# Altium PCB Final-Converter.PcbDoc
Units mil, origin at the board's own origin, x right, y up, seen from the top; angles counter-clockwise.
Board outline 5700 x 3075 mil, 2 copper layers (Top Layer, Bottom Layer); 12 components, 8 nets, 32 pads, 0 vias.
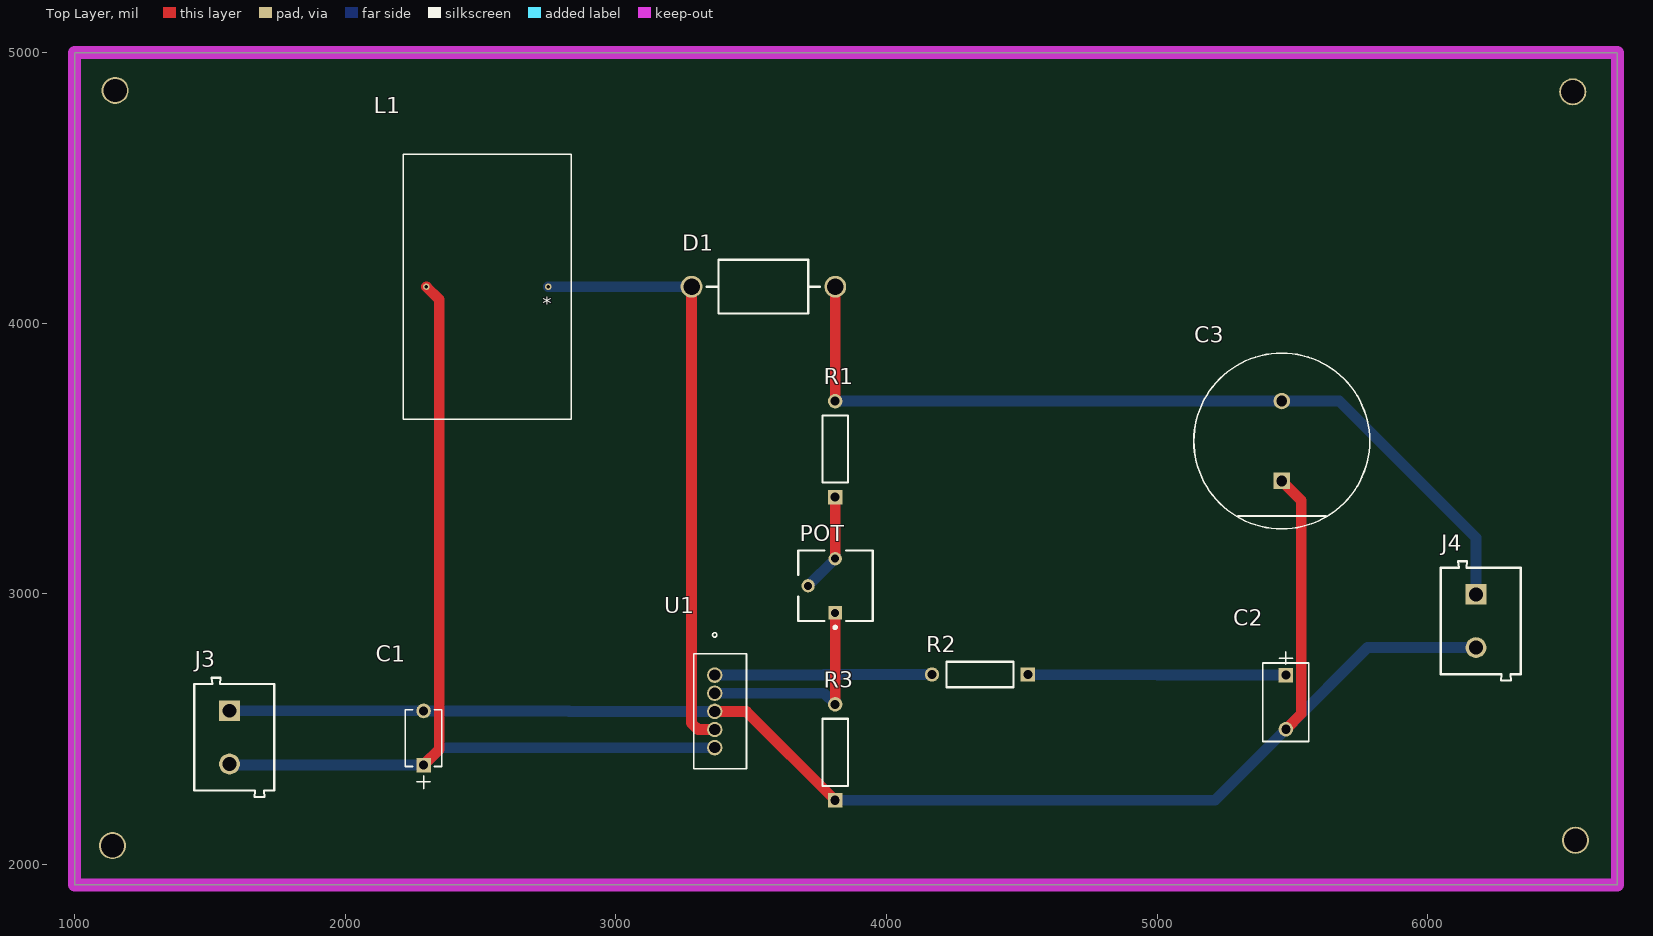
[diagram p0: Top Layer view]
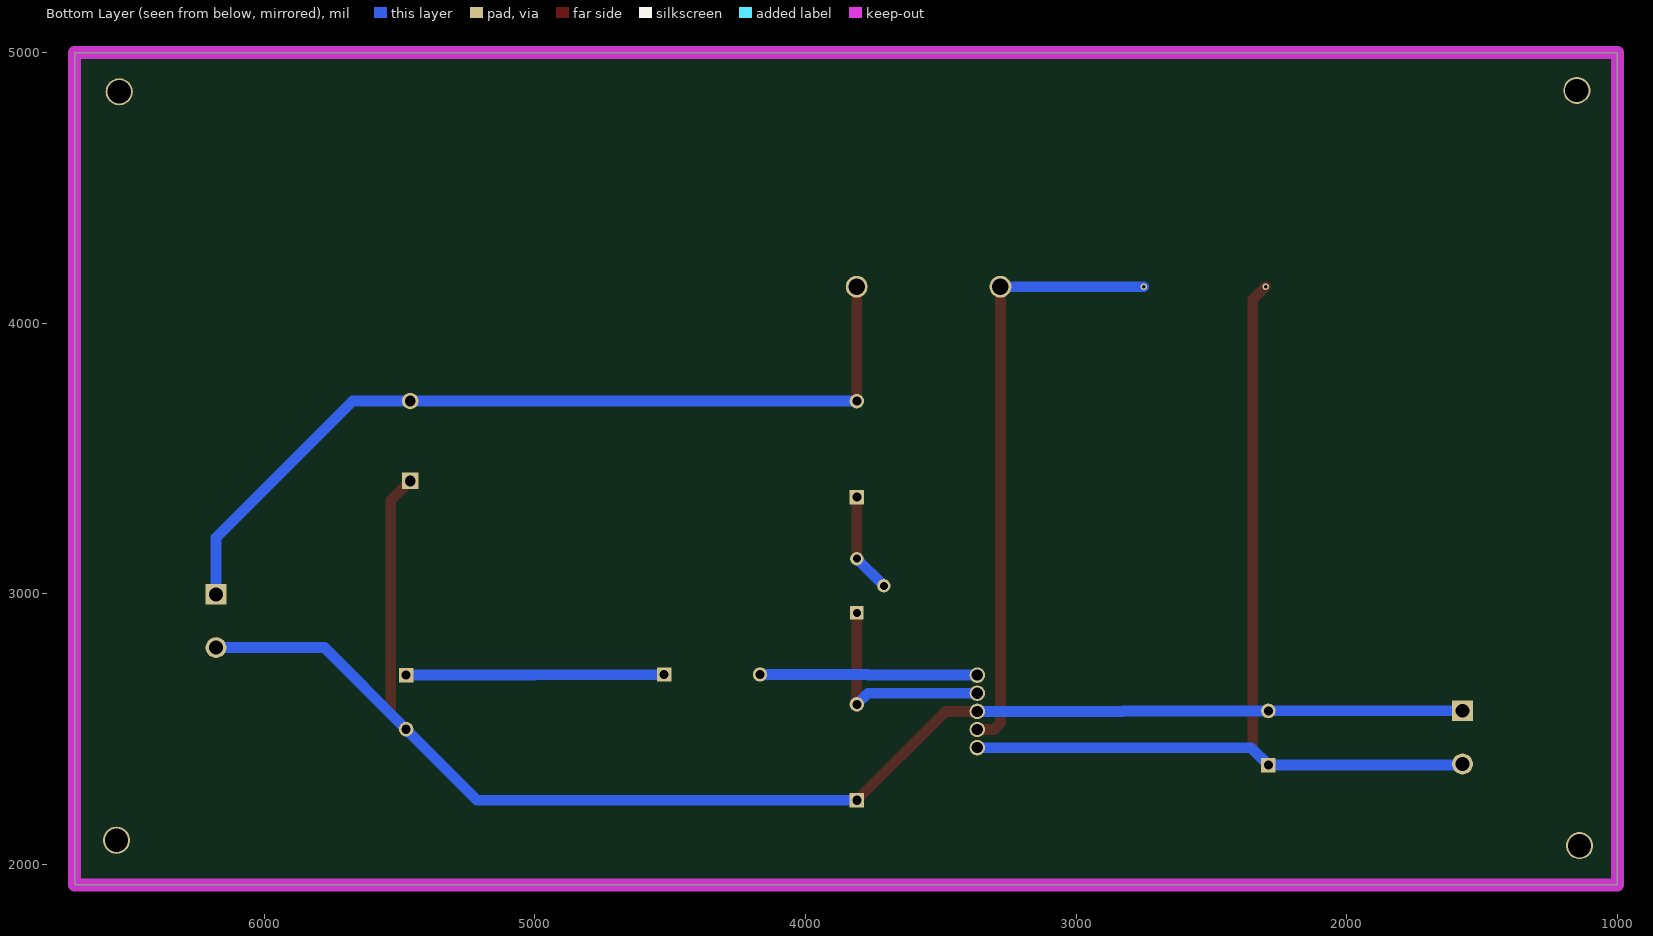
[diagram p1: Bottom Layer view, seen from below]

## Layer stack, top to bottom
Top Solder: solder mask 0.4, Solder Resist, Dk 3.5
Top Layer: signal copper 1.4
Dielectric 1: dielectric 12.6, FR-4, Dk 4.8
Bottom Layer: signal copper 1.4
Bottom Solder: solder mask 0.4, Solder Resist, Dk 3.5

## Board outline
1000,1925 6700,1925 6700,5000 1000,5000

## Design rules (kind name [scope] priority, off if disabled: settings)
Clearance [All] p1: gap=10 ignorepadtopadclearanceinfootprint=FALSE except(0: Arc-Hole Track-Hole SMDPad-Hole THPad-Hole Via-Hole Fill-Hole Poly-Hole Region-Hole Text-Hole)
Height [All] p1: minheight=0 maxheight=1500 prefheight=500
PolygonConnect [All] p1: connectstyle=Relief reliefconductorwidth=10 reliefentries=4 polygonreliefangle="90 Angle" airgapwidth=10
RoutingVias [All] p1: holewidth=28 width=50 viastyle="Through Hole" minholewidth=28 minwidth=50 maxholewidth=28 maxwidth=50
SolderMaskExpansion [All] p1: expansion=4 istentingtop=FALSE
Width [All] p1: maxlimit=40 minlimit=40 preferedwidth=40 minimp=50.000000 maximp=50.000000 favimp=50.000000
29 further rules are at their usual default settings.

## Components (designator, comment, footprint, x,y, rotation, side; value= is the part's Value field where it differs from the comment)
C1 "0.18uF" CAP_C322C_MR_X7R_KEM 2289.52,2367.62 r90 top
C2 "0.33uF" CAP_C330_MR_X7R_KEM 5475,2700 r270 top
C3 "1000uF / 100V" FP-RAD-TH-D_16_0_5-L_25_2-MFG 5460,3565 r90 top
D1 "1N5821" ONSC-AXIAL_LEAD-2-267-05_V 3545,4135 r180 top
J3 "Input Battery" 691102710002 1590,2470 r270 top
J4 "Output LED" 691102710002 6195,2900 r270 top
L1 "100uH" IND_PE-53115NL_PUL 2750,4135 r180 top
POT "100 kOhm" BOUR-3362P 3811.38,3030 r90 top
R1 "1 kOhm" RESA60-630X240 3810,3535 r90 top
R2 "2.2 kOhm" RESA60-630X240 4344.86,2702.31 r180 top
R3 "2.2 kOhm" RESA60-630X240 3810,2415 r90 top
U1 "LM2577T-ADJ/NOPB" T05A_TEX 3365,2700 r270 top

## Footprints (in the part's own frame and the unit in brackets; to place one, negate y for a bottom-side part, rotate by r counter-clockwise, add the part's x,y. Pads: shape width x height; smd on the part's side, far side on the other; paste and mask are expansions set on the pad)
691102710002 [mm] "5,00mm - modular - blue - Horizontal entry with pressure clamp - 9,9 mm height - 02p"
  rect 1.95x1.95 hole 1.3: 1(-2.5,-0.45)
  round 1.95 hole 1.3: 2(2.5,-0.45)
  silkscreen extent -5.6,-3.75 5.6,3.75, body extent -5.6,-3.75 5.6,3.75, height 9.96
BOUR-3362P [mm] "THD, 3-Leads, Body 6.6x6.99mm, Pitch 2.54mm"
  rect 1.25x1.25 hole 0.75: 1(-2.54,0.035)
  round 1.25 hole 0.75: 2(0,2.575) 3(2.54,0.035)
  silkscreen extent -4.02,-3.49 3.3,3.49, body extent -3.3,-3.49 3.3,3.49, height 4.95
CAP_C322C_MR_X7R_KEM [mil]
  rect 54x54 hole 34 mask+0: 1(0,0)
  round 54 hole 34 mask+0: 2(200,0)
  silkscreen extent -87,-68 205,67, body extent 0,0 10,10, height 10
CAP_C330_MR_X7R_KEM [mil]
  rect 54x54 hole 34 mask+0: 1(0,0)
  round 54 hole 34 mask+0: 2(200,0)
  silkscreen extent -87,-85 245,85, body extent 0,0 10,10, height 10
FP-RAD-TH-D_16_0_5-L_25_2-MFG [mm]
  rect 1.55x1.55 hole 1 paste-1000 mask+0: 1(-3.75,0)
  round 1.55 hole 1 paste-1000 mask+0: 2(3.75,0)
  silkscreen extent -8.25,-8.25 8.25,8.25, body extent -8.35,-8.35 8.35,8.35, height 0.25
IND_PE-53115NL_PUL [mil]
  round 24 hole 14 mask+0: 1(0,0) 2(450.39,0)
  silkscreen extent -85,-490 535,490, body extent -5,-485 460,485, height 1105
ONSC-AXIAL_LEAD-2-267-05_V [mm] "AXIAL, 2-Leads, Diameter 5.05mm"
  round 2.05 hole 1.55: 1(-6.745,0) 2(6.745,0)
  silkscreen extent -5.32,-2.53 5.32,2.53
RESA60-630X240 [mm] "Axial Resistor, 2-Leads, Dia 2.4mm, Body Length 6.3mm"
  rect 1.35x1.35 hole 0.85: 1(-4.5,0)
  round 1.35 hole 0.85: 2(4.5,0)
  silkscreen extent -3.15,-1.2 3.15,1.2, body extent -3.15,-1.2 3.15,1.2, height 2.4
T05A_TEX [mil]
  round 57 / inner round 57 / far side oval 57x57.5 hole 41 mask+7: 1(0,0) 2(67,0) 3(134,0) 4(201,0) 5(268,0)
  silkscreen extent -156,-78 346,118, body extent -74,-73 341,113, height 610

## Part data
C1: library part C322C184K5R5TA, "No Description Available", Mfr_Name=Kemet, Copyright="Copyright (C) 2022 Ultra Librarian. All rights reserved.", Digi-Key_Part_Number_1=399-C322C184K5R5TA-ND, Manufacturer_Part_Number=C322C184K5R5TA, RefDes=RefDes, Type=DEV
C2: library part "0.33uF Cap", "No Description Available", Manufacturer_Part_Number=C330C334K5R5TA, Mfr_Name=Kemet, Copyright="Copyright (C) 2022 Ultra Librarian. All rights reserved.", Digi-Key_Part_Number_1=399-4408-ND, RefDes=RefDes, Type=DEV
C3: library part CMP-05427-000487-1, "Aluminum Electrolytic Capacitors (Radial Lead Type) 1000uF ±20% 50V", Capacitance=1mF, Case/Package=Radial, ESR (Equivalent Series Resistance)=16mR, Max Operating Temperature=105°C, Min Operating Temperature=-40°C, Package Quantity=250, Ripple Current=3.32A, Tolerance=20%, Voltage Rating=50V, Contact Plating=Tin, Diameter=16mm, Features="General Purpose", Height=25mm, Height - Seated (Max)=0.984inch, Impedance=16mR, Lead Diameter=0.8mm, Lead Free="Lead Free", Lead Pitch=7.5mm, Length=25mm, Life (Hours)=10000Hour, Mount="Through Hole", Number of Pins=2, Packaging="Tape and Reel", Polarity=Polar, Radiation Hardening=No, REACH SVHC="No SVHC", RoHS Compliant=Yes, Series=FR, Termination="Through Hole", Voltage Rating (DC)=50V
D1: library part CMP-1055-00029-1, "Rectifier, 2-Pin Axial_Lead, Bulk Bag", Manufacturer="On Semiconductor", ComponentLink1Description="Manufacturer URL", ComponentLink1URL=http://www.onsemi.com/, ComponentLink2Description=Datasheet, ComponentLink2URL=http://www.onsemi.cn/pub_link/Collateral/1N5820-D.PDF, ComponentLink3Description="Package Specification", ComponentLink3URL=http://www.onsemi.com/pub_link/Collateral/267-05.PDF, Configuration=Single, DatasheetVersion="Rev. 10", IFSM Max (A)=80, Mounting Technology="Through Hole", Note1=0, PackageDescription="2-Pin, Axial Lead, Diameter 5.05 mm", PackageReference=AXIAL_LEAD-2-267-05, PackageVersion="Rev. G, 06/2000", Packing="Bulk Bag", PartNumber=1N5821, RoHS=FALSE
J3 J4: library part CMP-1502-03258-1, "Series 102 - 5.00 mm Horizontal Entry Modular with Pressure Clamp WR-TBL, 2 pin", Manufacturer="Wurth Elektronik", Operating Temperature=-40to105degC, Package Reference=691102710002, Datasheet URL=http://katalog.we-online.de/em/datasheet/6911027100xx.pdf, Manufacturer URL=http://www.we-online.de, Mounting Technology=THT, Packaging=Box, Part Number=691102710002, Pin Number=2, Pitch=5.00mm, Publisher=WurthElektronik
L1: library part PE-53115NL, "No Description Available", Mfr_Name="Pulse Electronics Corporation", Copyright="Copyright (C) 2022 Ultra Librarian. All rights reserved.", Digi-Key_Part_Number_1=553-1566-5-ND, Manufacturer_Part_Number=PE-53115NL, RefDes=RefDes, Type=DEV
POT: library part CMP-1747-00004-1, "Square Trimpot(R) Trimming Potentiometer, 10 KOhm, 300 V, -55 to 125 degC, 3-Pin THD, RoHS, Tube", Case Code (Imperial)=0612, Case Code (Metric)=1632, Case/Package=1206, Max Operating Temperature=125degC, Min Operating Temperature=-25degC, Package Quantity=5000, Power Rating="1 W", Resistance="50 mohm", Tolerance=1%, Voltage Rating="220 mV", ComponentLink1Description="Manufacturer URL", ComponentLink1URL=http://www.bourns.com/, ComponentLink2Description=Datasheet, ComponentLink2URL=http://www.bourns.com/docs/Product-Datasheets/3362.pdf, DatasheetVersion=May-16, Height="0.6 mm", Length="3.2 mm", Mount="Surface Mount", PackageDescription="3-Pin Through Hole Device, Body 6.6 x 6.99 mm, Pitch 2.54 mm", PackageReference=3326P, Packaging="Tape and Reel", Pins=2, REACH SVHC="No SVHC", RoHSCompliant=True, Width="1.6 mm"
R1 R2 R3: library part CMP-1659-00075-1, "Axial Resistor, 1 KOhm, +/- 1%, 250 mW, -55 to 155 degC, 2-Pin THD, RoHS, Bulk", Case\Package=Axial, Max Operating Temperature="155 degC", Min Operating Temperature="-55 degC", Package Quantity=200, Power Rating="250 mW", Resistance="10 kohm", Tolerance=1%, Voltage Rating="250 V", ComponentLink1Description="Manufacturer URL", ComponentLink1URL=http://www.yageo.com/, ComponentLink2Description=Datasheet, ComponentLink2URL=http://www.yageo.com/documents/recent/Yageo%20LR_MFR_2013.pdf, DatasheetVersion=Apr-13, Length="0.248 inch", PackageDescription="2-Pin Axial Lead, Dia 2.4 mm, Body Length 6.3 mm", PackageReference=MFR-25, Packaging=Bulk, RoHSCompliant=true
U1: "No Description Available", Mfr_Name="Texas Instruments", Copyright="Copyright (C) 2022 Ultra Librarian. All rights reserved.", Digi-Key_Part_Number_1=LM2577T-ADJ/NOPB-ND, Digi-Key_Part_Number_2=2156-LM2577T-ADJ/NOPB-ND, Digi-Key_Part_Number_3=2156-LM2577T-ADJ/NOPB-TI-ND, Manufacturer_Part_Number=LM2577T-ADJ/NOPB, RefDes=RefDes, Type=DEV

## Free pads (board coordinates)
  round 100 hole 86: 2(1140,2070) 2(1150,4860) 2(6535,4855) 2(6545,2090)

## Nets (pads, with @x,y where several pads share a name; then routed paths per layer and width w, separated by ;. In a path a pad name is that pad's centre, name@x,y a point inside that pad or via, vN(x,y) a via of type N, cw(c..) or ccw(c..) an arc to the next point about the centre after c; other vN are vias at no path point)
GND: C1.2 C2.2 C3.1 J3.1 J4.2 R3.1 U1.3 | length 5945.1
  Top Layer w40: U1.3 3481.83,2566 R3.1 ; C3.1 5532,3345.36 5532,2557 C2.2
  Bottom Layer w40: J3.1 C1.2@2288.71,2568.43 ; C1.2 2826,2567.62 2827.62,2566 U1.3 ; R3.1 5212.83,2237.83 C2.2 5776.58,2801.58 J4.2
NetC1_1: C1.1 J3.2 L1.2 U1.5 | length 3631.8
  Top Layer w40: C1.1 2347,2425.1 2347,4087.61 L1.2
  Bottom Layer w40: J3.2 1576.24,2367.62 C1.1 2353.9,2432 U1.5
NetC2_1: C2.1 R2.1 | length 953
  Bottom Layer w40: R2.1 5001.31,2700 C2.1
NetC3_2: C3.2 D1.1 J4.1 R1.2 | length 3209
  Top Layer w40: R1.2 3810,3923 3810.55,3923.55 D1.1
  Bottom Layer w40: R1.2 4634,3712.17 4634.47,3712.64 C3.2 5672.36,3712.64 6177.28,3207.72 J4.1
NetD1_2: D1.2 L1.1 U1.4 | length 2237.2
  Top Layer w40: D1.2 3279.45,2522.55 3303,2499 U1.4
  Bottom Layer w40: L1.1 D1.2
NetPOT_1: POT.1 R3.2 U1.2 | length 799.7
  Top Layer w40: R3.2 POT.1
  Bottom Layer w40: U1.2 3769.17,2633 R3.2
NetPOT_2: POT.2 POT.3 R1.1 | length 369.3
  Top Layer w40: POT.3 R1.1
  Bottom Layer w40: POT.2 POT.3
NetR2_2: R2.2 U1.1 | length 803.6
  Bottom Layer w40: U1.1 3766,2700 3768.31,2702.31 R2.2

## Keep-outs
Keep-Out Layer:
  the board outline again, w47.24

## Silkscreen, mask and mechanical layers (free items; w line width, h text height)
Board Outline:
  the board outline again, w47.24

## Text inside footprints (layer, text, board x,y; h text height)
L1: Top Overlay "*" at 2762.5,4118 h50 r180; Mechanical 13 "*" at 2832.3,4160 h50 r180